# Altium PCB PiMX8MP_r0.3.PcbDoc (part 2 of 10)
Units mm, origin at the board's own origin, x right, y up, seen from the top; angles counter-clockwise.
Board outline 55 x 40 mm, 10 copper layers (Top Layer, Layer 1, Layer 2, Layer 3, Layer 4, Layer 5, Layer 6, Layer 7, Layer 8, Bottom Layer), stack 1.472 mm thick; 545 components, 477 nets, 2606 pads, 2278 vias.
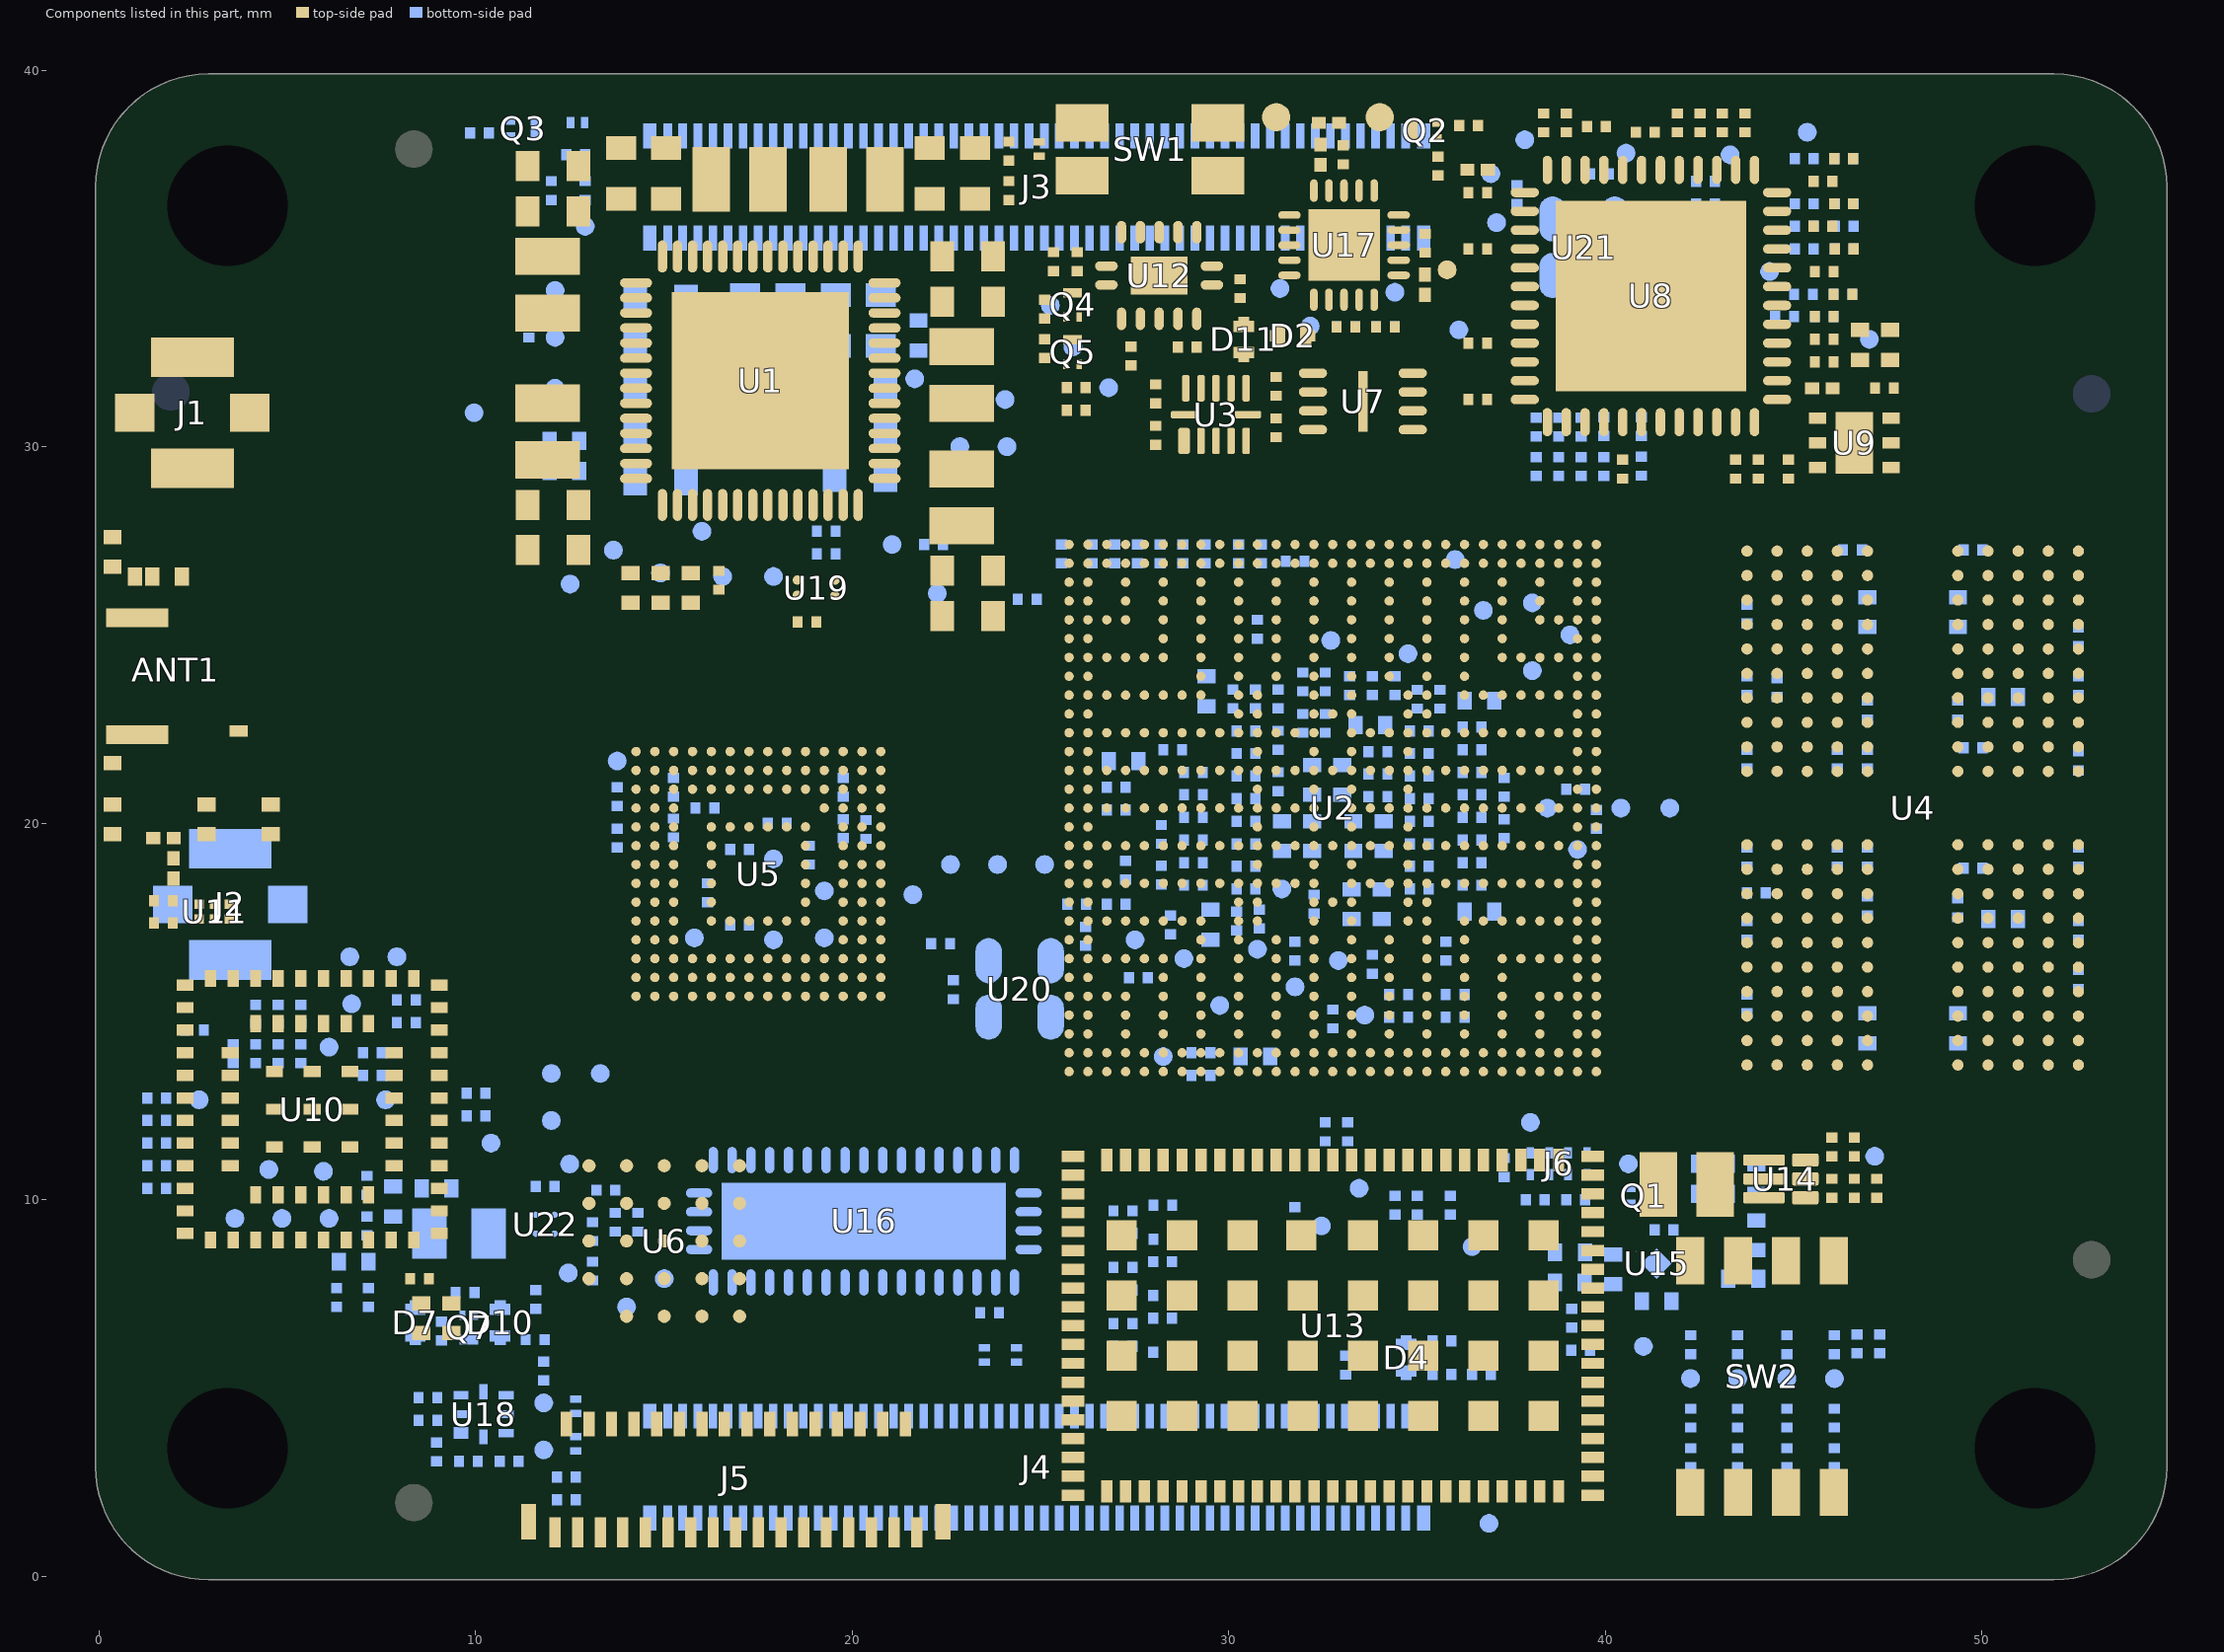
[diagram p10: the components of this part, seen from the top]

## Components (designator, comment, footprint, x,y, rotation, side; value= is the part's Value field where it differs from the comment) (continued)
R29 "100k 1%" RESC0603X03L 42.262,6.15 r270 bottom
R30 "10k 1%" RESC0603X03L 29.262,13.904 r0 bottom
R31 "0R 1%" RESC0603X03L 30.262,27.154 r90 bottom
R32 "0R 1%" RESC0603X03L 31.762,26.954 r180 bottom
R33 "0R 1%" RESC0603X03L 30.862,27.154 r270 bottom
R34 "0R 1%" RESC0603X03L 12.412,2.029 r0 bottom
R35 "0R 1%" RESC0603X03L 30.762,25.154 r270 bottom
R36 "0R 1%" RESC0603X03L 12.412,2.629 r0 bottom
R37 "4.7k 1%" RESC0603X03L 33.112,33.179 r180 bottom
R38 "4.7k 1%" RESC0603X03L 34.162,33.179 r0 bottom
R39 "8.2k 1%" RESC0603X03L 32.762,14.804 r270 bottom
R40 "10k 1%" RESC0603X03L 35.887,9.854 r90 bottom
R41 "8.2k 1%" RESC0603X03L 25.562,27.154 r270 bottom
R42 "0R 1%" RESC0603X03L 36.012,15.454 r0 bottom
R43 "0R 1%" RESC0603X03L 36.012,14.854 r0 bottom
R44 "0R 1%" RESC0603X03L 34.512,15.454 r180 bottom
R45 "0R 1%" RESC0603X03L 34.512,14.854 r180 bottom
R46 "200R 1%" RESC0603X03L 35.762,16.604 r90 bottom
R47 "200R 1%" RESC0603X03L 33.812,16.254 r90 bottom
R48 "0R 1%" RESC0603X03L 44.562,23.604 r270 bottom
R49 "10k 1%" RESC0603X03L 46.962,21.704 r90 bottom
R50 "10k 1%" RESC0603X03L 46.162,21.704 r90 bottom
R51 "0R 1%" RESC0603X03L 44.012,18.154 r0 bottom
R52 "10k 1%" RESC0603X03L 46.962,19.104 r270 bottom
R53 "10k 1%" RESC0603X03L 46.162,19.104 r270 bottom
R54 "240R 1%" RESC0603X03L 46.562,27.254 r0 bottom
R55 "240R 1%" RESC0603X03L 49.762,27.254 r180 bottom
R56 "150R 1%" RESC0603X03L 49.762,18.804 r0 bottom
R57 "150R 1%" RESC0603X03L 49.762,22.004 r0 bottom
R58 "10k 1%" RESC0603X03L 20.362,19.834 r270 bottom
R59 "10k 1%" RESC0603X03L 15.262,19.874 r90 bottom
R60 "10k 1%" RESC0603X03L 16.092,20.404 r180 bottom
R61 "10k 1%" RESC0603X03L 17.012,19.304 r0 bottom
R62 "10k 1%" RESC0603X03L 47.286,6.175 r90 bottom
R63 "10k 1%" RESC0603X03L 31.262,31.604 r270 top
R64 "10k 1%" RESC0603X03L 46.686,6.175 r90 bottom
R65 "10k 1%" RESC0603X03L 13.112,9.154 r90 bottom
R66 "4.7k 1%" RESC0603X03L 13.462,10.254 r0 bottom
R67 "10k 1%" RESC0603X03L 46.342,36.454 r0 bottom
R68 "10k 1%" RESC0603X03L 46.332,37.654 r0 bottom
R69 "10k 1%" RESC0603X03L 45.812,33.454 r0 bottom
R70 "10k 1%" RESC0603X03L 46.312,34.054 r0 bottom
R71 "10k 1%" RESC0603X03L 46.342,35.254 r0 bottom
R72 "10k 1%" RESC0603X03L 46.342,35.854 r0 bottom
R73 "1k 1%" RESC0603X03L 43.712,38.604 r90 top
R74 "10k 1%" RESC0603X03L 39.762,38.504 r180 top
R75 "10k 1%" RESC0603X03L 43.112,38.604 r90 top
R76 "22R 1%" RESC0603X03L 45.782,35.854 r180 top
R77 "22R 1%" RESC0603X03L 46.342,35.254 r180 top
R78 "22R 1%" RESC0603X03L 46.312,34.054 r180 top
R79 "22R 1%" RESC0603X03L 45.812,33.454 r180 top
R80 "0Ohm 1%" RESC1005X04L 47.562,32.704 r270 top
R81 "22R 1%" RESC0603X03L 46.332,37.654 r180 top
R82 "22R 1%" RESC0603X03L 46.332,36.454 r180 top
R83 "0Ohm 1%" RESC1005X04L 46.762,32.704 r270 top
R84 "1k 1%" RESC0603X03L 45.282,36.454 r0 bottom
R85 "1k 1%" RESC0603X03L 45.282,37.654 r0 bottom
R86 "1k 1%" RESC0603X03L 44.762,33.454 r0 bottom
R87 "1k 1%" RESC0603X03L 45.262,34.054 r0 bottom
R88 "1k 1%" RESC0603X03L 45.282,35.254 r0 bottom
R89 "1k 1%" RESC0603X03L 45.282,35.854 r0 bottom
R90 "22R 1%" RESC0603X03L 37.65,36.7 r90 bottom
R91 "6.04k 1%" RESC0603X03L 38.362,38.604 r90 top
R92 "10k 1%" RESC0603X03L 38.162,29.474 r270 bottom
R93 "10k 1%" RESC0603X03L 38.762,29.474 r270 bottom
R94 "10k 1%" RESC0603X03L 40.962,29.484 r270 bottom
R95 "10k 1%" RESC0603X03L 39.962,29.474 r270 bottom
R96 "10k 1%" RESC0603X03L 39.362,29.474 r270 bottom
R97 "10k 1%" RESC0603X03L 42.662,37.054 r0 bottom
R98 "22R 1%" RESC0603X03L 41.062,38.354 r0 top
R99 "1k 1%" RESC0603X03L 38.162,30.524 r270 bottom
R100 "1k 1%" RESC0603X03L 38.762,30.524 r270 bottom
R101 "1k 1%" RESC0603X03L 40.962,30.534 r270 bottom
R102 "1k 1%" RESC0603X03L 39.962,30.534 r270 bottom
R103 "1k 1%" RESC0603X03L 39.362,30.524 r270 bottom
R104 "1k 1%" RESC0603X03L 42.662,36.454 r180 bottom
R105 "1.8k 1%" RESC0603X03L 7.162,7.404 r90 bottom
R106 "1.8k 1%" RESC0603X03L 7.112,9.304 r270 bottom
R107 "10k 1%" RESC0603X03L 1.537,12.704 r0 bottom
R108 "10k 1%" RESC0603X03L 1.537,10.904 r0 bottom
R109 "10k 1%" RESC0603X03L 1.537,10.304 r0 bottom
R110 "10k 1%" RESC0603X03L 1.537,12.104 r0 bottom
R111 "10k 1%" RESC0603X03L 1.537,11.504 r0 bottom
R112 "0R 1%" RESC0603X03L 22.35,16.8 r180 bottom
R113 "22R 1%" RESC0603X03L 10.012,12.229 r180 bottom
R114 "22R 1%" RESC0603X03L 10.012,12.829 r180 bottom
R115 "10k 1%" RESC0603X03L 2.537,14.504 r0 bottom
R116 "22R 1%" RESC0603X03L 27.411,32.411 r270 top
R117 "4.75k 1%" RESC0603X03L 7.262,13.904 r0 bottom
R118 "10k 1%" RESC0603X03L 3.562,13.879 r90 bottom
R119 "10k 1%" RESC0603X03L 4.162,14.929 r90 bottom
R120 "10k 1%" RESC0603X03L 5.362,14.929 r90 bottom
R121 "10k 1%" RESC0603X03L 4.762,14.929 r90 bottom
R122 "0Ohm 1%" RESC1005X04L 9.362,6.854 r270 top
R123 "0R 1%" RESC0603X03L 4.162,13.879 r90 bottom
R124 "0R 1%" RESC0603X03L 5.362,13.879 r90 bottom
R125 "0R 1%" RESC0603X03L 4.762,13.879 r90 bottom
R126 "0Ohm 1%" RESC1005X04L 8.562,6.854 r270 top
R127 "0R 1%" RESC0603X03L 39.342,6.004 r180 bottom
R128 "0R 1%" RESC0603X03L 31.762,9.554 r90 bottom
R129 "0Ohm 1%" RESC1005X04L 44.012,9.059 r90 bottom
R130 "453k 1%" RESC0603X03L 46.612,11.404 r90 top
R131 "10k 1%" RESC0603X03L 46.012,10.304 r270 top
R132 "100k 1%" RESC0603X03L 47.212,10.304 r90 top
R133 "0Ohm 1%" RESC1005X04L 43.662,7.904 r180 bottom
R134 "100k 1%" RESC0603X03L 41.562,9.204 r0 bottom
R135 "10k 1%" RESC0603X03L 39.212,10.004 r180 bottom
R136 "0R 1%" RESC0603X03L 27.192,9.104 r180 bottom
R137 "0R 1%" RESC0603X03L 27.192,9.704 r180 bottom
R138 "0R 1%" RESC0603X03L 27.192,8.204 r180 bottom
R139 "0R 1%" RESC0603X03L 27.192,7.604 r180 bottom
R140 "0R 1%" RESC0603X03L 27.192,6.104 r180 bottom
R141 "0R 1%" RESC0603X03L 27.192,6.704 r180 bottom
R142 "0R 1%" RESC0603X03L 28.252,8.954 r180 bottom
R143 "0R 1%" RESC0603X03L 28.252,9.854 r180 bottom
R144 "0R 1%" RESC0603X03L 28.242,8.354 r180 bottom
R145 "0R 1%" RESC0603X03L 28.242,7.454 r180 bottom
R146 "0R 1%" RESC0603X03L 28.242,5.954 r180 bottom
R147 "0R 1%" RESC0603X03L 28.242,6.854 r180 bottom
R148 "10k 1%" RESC0603X03L 13.112,8.104 r270 bottom
R149 "0R 1%" RESC0603X03L 34.162,33.179 r180 top
R150 "0R 1%" RESC0603X03L 33.112,33.179 r0 top
R151 "10k 1%" RESC0603X03L 35.562,37.454 r90 top
R152 "100k 1%" RESC0603X03L 36.367,38.529 r180 top
R153 "4.7k 1%" RESC0603X03L 24.162,37.854 r90 top
R154 "10k 1%" RESC0603X03L 28.9,32.65 r180 top
R155 "10k 1%" RESC0603X03L 12.662,37.754 r180 bottom
R156 "100k 1%" RESC0603X03L 25.953,30.969 r180 top
R157 "10k 1%" RESC0603X03L 10.107,38.329 r0 bottom
R158 "0R 1%" RESC0603X03L 25.978,34.919 r90 top
R159 "0R 1%" RESC0603X03L 25.353,34.919 r90 top
R160 "100k 1%" RESC0603X03L 25.112,32.604 r270 top
R161 "10k 1%" RESC0603X03L 25.953,31.569 r180 top
R162 "100k 1%" RESC0603X03L 35.662,5.354 r0 bottom
R163 "10k 1%" RESC0603X03L 33.112,5.604 r90 bottom
R164 "100k 1%" RESC0603X03L 35.662,6.254 r0 bottom
R165 "10k 1%" RESC0603X03L 36.712,5.354 r180 bottom
R167 "100k 1%" RESC0603X03L 11.582,6.284 r0 bottom
R168 "10k 1%" RESC0603X03L 11.6,7.35 r270 bottom
R169 "1.8k 1%" RESC0603X03L 11.812,5.454 r90 bottom
R170 "1.8k 1%" RESC0603X03L 10.892,3.054 r180 bottom
R171 "10k 1%" RESC0603X03L 8.737,4.139 r180 bottom
R172 "10k 1%" RESC0603X03L 8.737,4.739 r180 bottom
R173 "100k 1%" RESC0603X03L 9.722,7.534 r180 bottom
R174 "24k 1%" RESC0603X03L 9.102,6.514 r90 bottom
R175 "4.7k 1%" RESC0603X03L 12.912,36.804 r270 bottom
R176 "4.7k 1%" RESC0603X03L 12.012,36.804 r270 bottom
R177 "22R 1%" RESC0603X03L 26.377,27.154 r90 bottom
R178 "22R 1%" RESC0603X03L 26.977,27.154 r90 bottom
R179 "22R 1%" RESC0603X03L 27.577,27.154 r90 bottom
R180 "22R 1%" RESC0603X03L 28.177,27.154 r90 bottom
R181 "22R 1%" RESC0603X03L 29.377,27.154 r90 bottom
R182 "22R 1%" RESC0603X03L 28.777,27.154 r90 bottom
R183 "10k 1%" RESC0603X03L 8.162,15.304 r180 bottom
R184 "12k 1%" RESC0603X03L 8.162,14.704 r0 bottom
R185 "10k 1%" RESC0603X03L 38.142,10.005 r0 bottom
R186 "0R 1%" RESC0603X03L 41.2,35.5 r270 bottom
SW1 "EVQ-P7J01P" SW_TACT_EVQ-P7J01P 27.912,37.904 r180 top
SW2 "97C04SRT" SW_DIP_4POL_97C04SRT 44.162,5.304 r0 top
TP1 "Testpoint 0.5mm" TP_0.50MM 21.662,31.804 r90 bottom
TP2 "Testpoint 0.5mm" TP_0.50MM 32.712,24.854 r90 bottom
TP3 "Testpoint 0.5mm" TP_0.50MM 12.112,31.554 r90 bottom
TP4 "Testpoint 0.5mm" TP_0.50MM 22.262,26.104 r90 bottom
TP5 "Testpoint 0.5mm" TP_0.50MM 31.412,18.254 r270 bottom
TP6 "Testpoint 0.5mm" TP_0.50MM 12.112,34.154 r90 bottom
TP7 "Testpoint 0.5mm" TP_0.50MM 12.512,26.354 r90 bottom
TP8 "Testpoint 0.5mm" TP_0.50MM 34.762,24.504 r90 bottom
TP9 "Testpoint 0.5mm" TP_0.50MM 36.762,25.654 r90 bottom
TP10 "Testpoint 0.5mm" TP_0.50MM 16.562,26.554 r90 bottom
TP11 "Testpoint 0.5mm" TP_0.50MM 21.062,27.404 r90 bottom
TP12 "Testpoint 0.5mm" TP_0.50MM 9.962,30.904 r90 bottom
TP13 "Testpoint 0.5mm" TP_0.50MM 25.262,33.754 r90 bottom
TP14 "Testpoint 0.5mm" TP_0.50MM 12.912,35.854 r90 bottom
TP15 "Testpoint 0.5mm" TP_0.50MM 28.262,13.804 r90 bottom
TP16 "Testpoint 0.5mm" TP_0.50MM 17.912,26.554 r90 bottom
TP17 "Testpoint 0.5mm" TP_0.50MM 14.912,26.649 r90 bottom
TP18 "Testpoint 0.5mm" TP_0.50MM 16.012,27.754 r90 bottom
TP19 "Testpoint 0.5mm" TP_0.50MM 13.662,27.254 r90 bottom
TP20 "Testpoint 0.5mm" TP_0.50MM 38.462,20.404 r0 bottom
TP21 "Testpoint 0.5mm" TP_0.50MM 40.412,20.404 r0 bottom
TP22 "Testpoint 0.5mm" TP_0.50MM 39.262,19.304 r0 bottom
TP23 "Testpoint 0.5mm" TP_0.50MM 41.712,20.404 r0 bottom
TP24 "Testpoint 0.5mm" TP_0.50MM 28.812,16.404 r90 bottom
TP25 "Testpoint 0.5mm" TP_0.50MM 30.762,16.654 r90 bottom
TP26 "Testpoint 0.5mm" TP_0.50MM 46.086,5.25 r90 bottom
TP27 "Testpoint 0.5mm" TP_0.50MM 44.818,5.25 r90 bottom
TP28 "Testpoint 0.5mm" TP_0.50MM 43.517,5.25 r90 bottom
TP29 "Testpoint 0.5mm" TP_0.50MM 42.262,5.254 r90 bottom
TP30 "Testpoint 0.5mm" TP_0.50MM 32.912,16.354 r90 bottom
TP31 "Testpoint 0.5mm" TP_0.50MM 31.762,15.654 r90 bottom
TP32 "Testpoint 0.5mm" TP_0.50MM 33.612,14.904 r90 bottom
TP33 "Testpoint 0.5mm" TP_0.50MM 29.762,15.162 r90 bottom
TP34 "Testpoint 0.5mm" TP_0.50MM 25.112,18.904 r90 bottom
TP35 "Testpoint 0.5mm" TP_0.50MM 21.612,18.104 r90 bottom
TP36 "Testpoint 0.5mm" TP_0.50MM 23.862,18.904 r90 bottom
TP37 "Testpoint 0.5mm" TP_0.50MM 22.612,18.904 r90 bottom
TP39 "Testpoint 0.5mm" TP_0.50MM 27.512,16.904 r90 bottom
TP43 "Testpoint 0.5mm" TP_0.50MM 17.912,19.054 r90 bottom
TP44 "Testpoint 0.5mm" TP_0.50mm 13.762,21.654 r90 bottom
TP45 "Testpoint 0.5mm" TP_0.50MM 19.262,18.204 r90 bottom
TP46 "Testpoint 0.5mm" TP_0.50MM 19.262,16.954 r90 bottom
TP47 "Testpoint 0.5mm" TP_0.50MM 17.912,16.904 r90 bottom
TP48 "Testpoint 0.5mm" TP_0.50MM 15.812,16.954 r90 bottom
TP49 "Testpoint 0.5mm" TP_0.50MM 31.362,34.204 r90 bottom
TP50 "Testpoint 0.5mm" TP_0.50MM 39.062,25.004 r90 bottom
TP51 "Testpoint 0.5mm" TP_0.50MM 36.012,27.004 r90 bottom
TP52 "Testpoint 0.5mm" TP_0.50MM 38.062,24.054 r90 bottom
TP53 "Testpoint 0.5mm" TP_0.50MM 38.062,25.854 r180 bottom
TP54 "Testpoint 0.5mm" TP_0.50MM 13.312,13.354 r180 bottom
TP55 "Testpoint 0.5mm" TP_0.50MM 12.5,10.95 r270 bottom
TP56 "Testpoint 0.5mm" TP_0.50MM 12.012,12.104 r270 bottom
TP57 "Testpoint 0.5mm" TP_0.50MM 12.012,13.354 r180 bottom
TP58 "Testpoint 0.5mm" TP_0.50MM 15.012,7.904 r270 bottom
TP59 "Testpoint 0.5mm" TP_0.50MM 14.012,7.154 r270 bottom
TP60 "Testpoint 0.5mm" TP_0.50MM 47.012,32.854 r180 bottom
TP61 "Testpoint 0.5mm" TP_0.50MM 45.362,38.354 r180 bottom
TP62 "Testpoint 0.5mm" TP_0.50MM 36.962,37.254 r90 bottom
TP63 "Testpoint 0.5mm" TP_0.50MM 42.762,34.554 r90 bottom
TP64 "Testpoint 0.5mm" TP_0.50MM 40.55,37.8 r90 bottom
TP65 "Testpoint 0.5mm" TP_0.50MM 37.862,38.154 r90 bottom
TP66 "Testpoint 0.5mm" TP_0.50MM 44.362,34.654 r90 bottom
TP67 "Testpoint 0.5mm" TP_0.50MM 43.312,37.754 r90 bottom
TP68 "Testpoint 0.5mm" TP_0.50MM 37.112,35.954 r90 bottom
TP70 "Testpoint 0.5mm" TP_0.50MM 34.412,34.104 r90 bottom
TP71 "Testpoint 0.5mm" TP_0.50MM 32.162,33.204 r90 bottom
TP72 "Testpoint 0.5mm" TP_0.50MM 6.712,15.204 r270 bottom
TP73 "Testpoint 0.5mm" TP_0.50MM 7.912,16.454 r270 bottom
TP74 "Testpoint 0.5mm" TP_0.50MM 6.662,16.454 r270 bottom
TP75 "Testpoint 0.5mm" TP_0.50MM 6.112,14.054 r180 bottom
TP76 "Testpoint 0.5mm" TP_0.50MM 3.612,9.504 r270 bottom
TP77 "Testpoint 0.5mm" TP_0.50MM 4.862,9.504 r270 bottom
TP78 "Testpoint 0.5mm" TP_0.50MM 4.512,10.804 r270 bottom
TP79 "Testpoint 0.5mm" TP_0.50MM 7.612,12.654 r180 bottom
TP80 "Testpoint 0.5mm" TP_0.50MM 6.112,9.504 r270 bottom
TP81 "Testpoint 0.5mm" TP_0.50MM 5.962,10.754 r270 bottom
TP82 "Testpoint 0.5mm" TP_0.50MM 10.412,11.504 r180 bottom
TP83 "Testpoint 0.5mm" TP_0.50MM 2.662,12.654 r180 bottom
TP84 "Testpoint 0.5mm" TP_0.50MM 41.012,6.104 r270 bottom
TP85 "Testpoint 0.5mm" TP_0.50MM 36.912,1.404 r270 bottom
TP86 "Testpoint 0.5mm" TP_0.50MM 33.462,10.304 r180 bottom
TP87 "Testpoint 0.5mm" TP_0.50MM 32.462,9.304 r270 bottom
TP88 "Testpoint 0.5mm" TP_0.50MM 36.462,8.754 r90 bottom
TP89 "Testpoint 0.5mm" TP_0.50MM 38.012,12.054 r90 bottom
TP90 "Testpoint 0.5mm" TP_0.50MM 47.154,11.154 r270 bottom
TP91 "Testpoint 0.5mm" TP_0.50MM 40.612,10.954 r180 bottom
TP92 "Testpoint 0.75mm" TP_0.75mm 31.262,38.754 r90 top
TP93 "Testpoint 0.75mm" TP_0.75mm 34.012,38.754 r90 top
TP94 "Testpoint 0.5mm" TP_0.50MM 12.462,8.054 r0 bottom
TP95 "Testpoint 0.5mm" TP_0.50MM 36.112,33.104 r90 bottom
TP96 "Testpoint 0.5mm" TP_0.50mm 35.8,34.7 r90 top
TP97 "Testpoint 0.5mm" TP_0.50MM 24.062,31.254 r270 bottom
TP98 "Testpoint 0.5mm" TP_0.50MM 24.112,30.004 r270 bottom
TP99 "Testpoint 0.5mm" TP_0.50MM 22.812,31.254 r270 bottom
TP100 "Testpoint 0.5mm" TP_0.50MM 22.862,30.004 r270 bottom
TP101 "Testpoint 0.5mm" TP_0.50MM 12.112,32.904 r90 bottom
TP102 "Testpoint 0.5mm" TP_0.50MM 26.812,31.569 r90 bottom
TP103 "Testpoint 0.5mm" TP_0.50MM 25.862,32.654 r90 bottom
TP104 "Testpoint 0.5mm" TP_0.50MM 11.812,4.604 r90 bottom
TP105 "Testpoint 0.5mm" TP_0.50MM 11.812,3.354 r270 bottom
U1 "PCA9450CHN" QFN40P700X700X100_HS-57L 17.562,31.754 r90 top
U2 "MIMX8ML8CVNKZAB" BGA548C50P29X29_1500X1500X148 32.762,20.404 r180 top locked
U3 "LSF0204GU12X" QFN40P170X200X50-12L 29.662,30.854 r90 top
U4 "MT53E1536M32D4DE-046-AIT-C" BGA200C65P12X22_1000X1450X114 48.162,20.404 r0 top locked
U5 "SDINBDG4-16G-I1" BGA153C50P14X14_1150X1300X80 17.512,18.654 r270 top locked
U6 "IS25WP064A-RHLE" BGA24C100P5X5_600X800X120 15.012,8.904 r90 top locked
U7 "W25Q16JVUXIQ TR" QFN50P300X200X60_HS-9L 33.562,31.204 r180 top
U8 "LAN8840-V/PSA" QFN50P700X700X100_HS-49L 41.212,34.004 r0 top locked
U9 "TLV73311PQDRVRQ1" SON65P200X80_HS-7L 46.612,30.104 r0 top
U10 "LBEE5PK2BC" "WIFI-BLE Module_LBEE5PK2BC" 5.662,12.404 r90 top locked
U11 "BGS12P2L6" PSON40P70X32-6N 3.062,17.654 r90 top
U12 "SN74LV6T17" QFN50P250X300X80_HS-13L 28.153,34.549 r270 top
U13 "Edge_TPU_G313-06329-00" LGA120C50P19X22_1000X1500X150 32.762,6.654 r180 top locked
U14 "TLV62595DMQR" VSON50P150X150X100_HS-6L 44.662,10.554 r180 top
U15 "TLV74018PDQNR" X2SON-DFN 41.362,8.304 r0 bottom
U16 "TS3DV642A0RUAR" QFN50P350X900X80_HS-43L 20.312,9.429 r90 bottom
U17 "SE051" QFN40P300X300X33_HS-21L 33.062,35.354 r0 top
U18 "PCA9509GM,125" XQFN8_160X106X50 10.212,4.304 r0 bottom
U19 "SiT1532AI-J4-D14-32.768E" OSCILLATOR_SITIME_SiT1532AI-J4-D14-32.768E 19.046,26.254 r270 top
U20 "DSC1001DI5-024.0000" DFN165P250X90-4N 24.45,15.6 r270 bottom
U21 "DSC1001DI5-025.0000" DFN165P250X90-4N 39.425,35.3 r90 bottom
U22 "SN74LVC1G17YZVR" BGA4C50P2X2_89X89X50 11.85,9.35 r180 bottom

## Footprints (in the part's own frame and the unit in brackets; to place one, negate y for a bottom-side part, rotate by r counter-clockwise, add the part's x,y. Pads: shape width x height; smd on the part's side, far side on the other; paste and mask are expansions set on the pad)
ANTENNA_ACAR0301-SW2 [mm]
  rect 0.5x1.65 smd mask+0.05: 1(-1.55,0) 2(1.55,0)
  rect 0.3x0.48 smd paste-1 mask+0.102: 3(-1.45,-2.7)
  rect 0.48x0.38 smd paste-1 mask+0.102: 4(2.65,0.05)
  rect 0.38x0.48 smd paste-1 mask+0.102: 5(-2.3,0.65)
  Top Layer region: 3.1,0.9 2.4,0.9 2.4,-0.6 2.9,-0.6 2.9,0.4 3.1,0.4
  Top Layer region: 1.8,0.9 1.3,0.9 1.3,-1.5 2.9,-1.5 2.9,-1 2.4,-1 2.4,-1.2 1.8,-1.2
  Top Layer region: -1.3,0.9 -1.3,-1.2 -4,-1.2 -4,-0.7 -1.8,-0.7 -1.8,0.9
  Top Layer region: -2.1,0.9 -2.1,0.4 -3.6,0.4 -3.6,0.9
  Top Layer region: -3.405,-3.4 -3.405,-3.7 -1.3,-3.7 -1.3,-1.7 -3.405,-1.7 -3.405,-2 -1.6,-2 -1.6,-3.4
  silkscreen extent -0.6,-0.72 0.6,0.72, body extent -1.53,-0.8 1.53,0.8, height 0.55
BGA4C50P2X2_89X89X50 [mm] "BGA, 4-Leads, Body 0,89x0,89mmx0,50mm, Pitch 0,50mm"
  round 0.17 smd: A1(-0.25,0.25) A2(0.25,0.25) B1(-0.25,-0.25) B2(0.25,-0.25)
  silkscreen extent -0.6,0.5 -0.5,0.6, body extent -0.45,-0.45 0.45,0.45, height 0.5
BGA24C100P5X5_600X800X120 [mm] "BGA, 24-Leads, Body 6,00x8,00mmx1,20mm, Pitch 1,00mm"
  round 0.35 smd: A2(-1,2) A3(0,2) A4(1,2) A5(2,2) B1(-2,1) B2(-1,1) B3(0,1) B4(1,1) B5(2,1) C1(-2,0) C2(-1,0) C3(0,0) C4(1,0) C5(2,0) D1(-2,-1) D2(-1,-1) D3(0,-1) D4(1,-1) D5(2,-1) E1(-2,-2) E2(-1,-2) E3(0,-2) E4(1,-2) E5(2,-2)
  Top Layer region: 3.5,-4 3,-4 3,-4.5 3.5,-4.5
  Top Layer region: -3.5,4 -3,4 -3,4.5 -3.5,4.5
  silkscreen extent -3.87,3.37 -3.63,3.62, body extent -3,-4 3,4, height 1.2
BGA153C50P14X14_1150X1300X80 [mm] "BGA, 153-Leads, Body 11,50x13,00mmx0,80mm, Pitch 0,50mm"
  round 0.25 smd: A1(-3.25,3.25) A2(-2.75,3.25) A3(-2.25,3.25) A4(-1.75,3.25) A5(-1.25,3.25) A6(-0.75,3.25) A7(-0.25,3.25) A8(0.25,3.25) A9(0.75,3.25) A10(1.25,3.25) A11(1.75,3.25) A12(2.25,3.25) A13(2.75,3.25) A14(3.25,3.25) B1(-3.25,2.75) B2(-2.75,2.75) B3(-2.25,2.75) B4(-1.75,2.75) B5(-1.25,2.75) B6(-0.75,2.75) B7(-0.25,2.75) B8(0.25,2.75) B9(0.75,2.75) B10(1.25,2.75) B11(1.75,2.75) B12(2.25,2.75) B13(2.75,2.75) B14(3.25,2.75) C1(-3.25,2.25) C2(-2.75,2.25) C3(-2.25,2.25) C4(-1.75,2.25) C5(-1.25,2.25) C6(-0.75,2.25) C7(-0.25,2.25) C8(0.25,2.25) C9(0.75,2.25) C10(1.25,2.25) C11(1.75,2.25) C12(2.25,2.25) C13(2.75,2.25) C14(3.25,2.25) D1(-3.25,1.75) D2(-2.75,1.75) D3(-2.25,1.75) D4(-1.75,1.75) D12(2.25,1.75) D13(2.75,1.75) D14(3.25,1.75) E1(-3.25,1.25) E2(-2.75,1.25) E3(-2.25,1.25) E5(-1.25,1.25) E6(-0.75,1.25) E7(-0.25,1.25) E8(0.25,1.25) E9(0.75,1.25) E10(1.25,1.25) E12(2.25,1.25) E13(2.75,1.25) E14(3.25,1.25) F1(-3.25,0.75) F2(-2.75,0.75) F3(-2.25,0.75) F5(-1.25,0.75) F10(1.25,0.75) F12(2.25,0.75) F13(2.75,0.75) F14(3.25,0.75) G1(-3.25,0.25) G2(-2.75,0.25) G3(-2.25,0.25) G5(-1.25,0.25) G10(1.25,0.25) G12(2.25,0.25) G13(2.75,0.25) G14(3.25,0.25) H1(-3.25,-0.25) H2(-2.75,-0.25) H3(-2.25,-0.25) H5(-1.25,-0.25) H10(1.25,-0.25) H12(2.25,-0.25) H13(2.75,-0.25) H14(3.25,-0.25) J1(-3.25,-0.75) J2(-2.75,-0.75) J3(-2.25,-0.75) J5(-1.25,-0.75) J10(1.25,-0.75) J12(2.25,-0.75) J13(2.75,-0.75) J14(3.25,-0.75) K1(-3.25,-1.25) K2(-2.75,-1.25) K3(-2.25,-1.25) K5(-1.25,-1.25) K6(-0.75,-1.25) K7(-0.25,-1.25) K8(0.25,-1.25) K9(0.75,-1.25) K10(1.25,-1.25) K12(2.25,-1.25) K13(2.75,-1.25) K14(3.25,-1.25) L1(-3.25,-1.75) L2(-2.75,-1.75) L3(-2.25,-1.75) L12(2.25,-1.75) L13(2.75,-1.75) L14(3.25,-1.75) M1(-3.25,-2.25) M2(-2.75,-2.25) M3(-2.25,-2.25) M4(-1.75,-2.25) M5(-1.25,-2.25) M6(-0.75,-2.25) M7(-0.25,-2.25) M8(0.25,-2.25) M9(0.75,-2.25) M10(1.25,-2.25) M11(1.75,-2.25) M12(2.25,-2.25) M13(2.75,-2.25) M14(3.25,-2.25) N1(-3.25,-2.75) N2(-2.75,-2.75) N3(-2.25,-2.75) N4(-1.75,-2.75) N5(-1.25,-2.75) N6(-0.75,-2.75) N7(-0.25,-2.75) N8(0.25,-2.75) N9(0.75,-2.75) N10(1.25,-2.75) N11(1.75,-2.75) N12(2.25,-2.75) N13(2.75,-2.75) N14(3.25,-2.75) P1(-3.25,-3.25) P2(-2.75,-3.25) P3(-2.25,-3.25) P4(-1.75,-3.25) P5(-1.25,-3.25) P6(-0.75,-3.25) P7(-0.25,-3.25) P8(0.25,-3.25) P9(0.75,-3.25) P10(1.25,-3.25) P11(1.75,-3.25) P12(2.25,-3.25) P13(2.75,-3.25) P14(3.25,-3.25)
  Top Layer region: 5.75,7 5.75,6.5 6.25,6.5 6.25,7
  Top Layer region: -5.75,-7 -5.75,-6.5 -6.25,-6.5 -6.25,-7
  silkscreen extent -6.62,5.88 -6.38,6.13, body extent -5.75,-6.5 5.75,6.5, height 0.8
BGA200C65P12X22_1000X1450X114 [mm] "BGA, 200-Leads, Body 10,00x14,50mmx1,14mm, Pitch 0,65mm"
  round 0.3 smd: A1(-4.4,6.825) A2(-3.6,6.825) A3(-2.8,6.825) A4(-2,6.825) A5(-1.2,6.825) A8(1.2,6.825) A9(2,6.825) A10(2.8,6.825) A11(3.6,6.825) A12(4.4,6.825) AA1(-4.4,-6.175) AA2(-3.6,-6.175) AA3(-2.8,-6.175) AA4(-2,-6.175) AA5(-1.2,-6.175) AA8(1.2,-6.175) AA9(2,-6.175) AA10(2.8,-6.175) AA11(3.6,-6.175) AA12(4.4,-6.175) AB1(-4.4,-6.825) AB2(-3.6,-6.825) AB3(-2.8,-6.825) AB4(-2,-6.825) AB5(-1.2,-6.825) AB8(1.2,-6.825) AB9(2,-6.825) AB10(2.8,-6.825) AB11(3.6,-6.825) AB12(4.4,-6.825) B1(-4.4,6.175) B2(-3.6,6.175) B3(-2.8,6.175) B4(-2,6.175) B5(-1.2,6.175) B8(1.2,6.175) B9(2,6.175) B10(2.8,6.175) B11(3.6,6.175) B12(4.4,6.175) C1(-4.4,5.525) C2(-3.6,5.525) C3(-2.8,5.525) C4(-2,5.525) C5(-1.2,5.525) C8(1.2,5.525) C9(2,5.525) C10(2.8,5.525) C11(3.6,5.525) C12(4.4,5.525) D1(-4.4,4.875) D2(-3.6,4.875) D3(-2.8,4.875) D4(-2,4.875) D5(-1.2,4.875) D8(1.2,4.875) D9(2,4.875) D10(2.8,4.875) D11(3.6,4.875) D12(4.4,4.875) E1(-4.4,4.225) E2(-3.6,4.225) E3(-2.8,4.225) E4(-2,4.225) E5(-1.2,4.225) E8(1.2,4.225) E9(2,4.225) E10(2.8,4.225) E11(3.6,4.225) E12(4.4,4.225) F1(-4.4,3.575) F2(-3.6,3.575) F3(-2.8,3.575) F4(-2,3.575) F5(-1.2,3.575) F8(1.2,3.575) F9(2,3.575) F10(2.8,3.575) F11(3.6,3.575) F12(4.4,3.575) G1(-4.4,2.925) G2(-3.6,2.925) G3(-2.8,2.925) G4(-2,2.925) G5(-1.2,2.925) G8(1.2,2.925) G9(2,2.925) G10(2.8,2.925) G11(3.6,2.925) G12(4.4,2.925) H1(-4.4,2.275) H2(-3.6,2.275) H3(-2.8,2.275) H4(-2,2.275) H5(-1.2,2.275) H8(1.2,2.275) H9(2,2.275) H10(2.8,2.275) H11(3.6,2.275) H12(4.4,2.275) J1(-4.4,1.625) J2(-3.6,1.625) J3(-2.8,1.625) J4(-2,1.625) J5(-1.2,1.625) J8(1.2,1.625) J9(2,1.625) J10(2.8,1.625) J11(3.6,1.625) J12(4.4,1.625) K1(-4.4,0.975) K2(-3.6,0.975) K3(-2.8,0.975) K4(-2,0.975) K5(-1.2,0.975) K8(1.2,0.975) K9(2,0.975) K10(2.8,0.975) K11(3.6,0.975) K12(4.4,0.975) N1(-4.4,-0.975) N2(-3.6,-0.975) N3(-2.8,-0.975) N4(-2,-0.975) N5(-1.2,-0.975) N8(1.2,-0.975) N9(2,-0.975) N10(2.8,-0.975) N11(3.6,-0.975) N12(4.4,-0.975) P1(-4.4,-1.625) P2(-3.6,-1.625) P3(-2.8,-1.625) P4(-2,-1.625) P5(-1.2,-1.625) P8(1.2,-1.625) P9(2,-1.625) P10(2.8,-1.625) P11(3.6,-1.625) P12(4.4,-1.625) R1(-4.4,-2.275) R2(-3.6,-2.275) R3(-2.8,-2.275) R4(-2,-2.275) R5(-1.2,-2.275) R8(1.2,-2.275) R9(2,-2.275) R10(2.8,-2.275) R11(3.6,-2.275) R12(4.4,-2.275) T1(-4.4,-2.925) T2(-3.6,-2.925) T3(-2.8,-2.925) T4(-2,-2.925) T5(-1.2,-2.925) T8(1.2,-2.925) T9(2,-2.925) T10(2.8,-2.925) T11(3.6,-2.925) T12(4.4,-2.925) U1(-4.4,-3.575) U2(-3.6,-3.575) U3(-2.8,-3.575) U4(-2,-3.575) U5(-1.2,-3.575) U8(1.2,-3.575) U9(2,-3.575) U10(2.8,-3.575) U11(3.6,-3.575) U12(4.4,-3.575) V1(-4.4,-4.225) V2(-3.6,-4.225) V3(-2.8,-4.225) V4(-2,-4.225) V5(-1.2,-4.225) V8(1.2,-4.225) V9(2,-4.225) V10(2.8,-4.225) V11(3.6,-4.225) V12(4.4,-4.225) W1(-4.4,-4.875) W2(-3.6,-4.875) W3(-2.8,-4.875) W4(-2,-4.875) W5(-1.2,-4.875) W8(1.2,-4.875) W9(2,-4.875) W10(2.8,-4.875) W11(3.6,-4.875) W12(4.4,-4.875) Y1(-4.4,-5.525) Y2(-3.6,-5.525) Y3(-2.8,-5.525) Y4(-2,-5.525) Y5(-1.2,-5.525) Y8(1.2,-5.525) Y9(2,-5.525) Y10(2.8,-5.525) Y11(3.6,-5.525) Y12(4.4,-5.525)
  Top Layer region: -5.5,7.25 -5,7.25 -5,7.75 -5.5,7.75
  Top Layer region: 5.5,-7.25 5,-7.25 5,-7.75 5.5,-7.75
  silkscreen extent -5.62,6.63 -5.37,6.87, body extent -5,-7.25 5,7.25, height 0.95
BGA548C50P29X29_1500X1500X148 [mm] "BGA, 548-Leads, Body 15,00x15,00mmx1,48mm, Pitch 0,50mm"
  round 0.25 smd: A1(-7,7) A2(-6.5,7) A3(-6,7) A4(-5.5,7) A5(-5,7) A6(-4.5,7) A7(-4,7) A8(-3.5,7) A9(-3,7) A10(-2.5,7) A11(-2,7) A12(-1.5,7) A13(-1,7) A14(-0.5,7) A15(0,7) A16(0.5,7) A17(1,7) A18(1.5,7) A19(2,7) A20(2.5,7) A21(3,7) A22(3.5,7) A23(4,7) A24(4.5,7) A25(5,7) A26(5.5,7) A27(6,7) A28(6.5,7) A29(7,7) AA1(-7,-3) AA2(-6.5,-3) AA3(-6,-3) AA4(-5.5,-3) AA5(-5,-3) AA6(-4.5,-3) AA7(-4,-3) AA8(-3.5,-3) AA10(-2.5,-3) AA11(-2,-3) AA14(-0.5,-3) AA16(0.5,-3) AA19(2,-3) AA20(2.5,-3) AA22(3.5,-3) AA23(4,-3) AA24(4.5,-3) AA25(5,-3) AA26(5.5,-3) AA27(6,-3) AA28(6.5,-3) AA29(7,-3) AB1(-7,-3.5) AB2(-6.5,-3.5) AB8(-3.5,-3.5) AB10(-2.5,-3.5) AB12(-1.5,-3.5) AB14(-0.5,-3.5) AB16(0.5,-3.5) AB18(1.5,-3.5) AB20(2.5,-3.5) AB22(3.5,-3.5) AB28(6.5,-3.5) AB29(7,-3.5) AC1(-7,-4) AC2(-6.5,-4) AC3(-6,-4) AC4(-5.5,-4) AC5(-5,-4) AC6(-4.5,-4) AC8(-3.5,-4) AC10(-2.5,-4) AC12(-1.5,-4) AC14(-0.5,-4) AC16(0.5,-4) AC18(1.5,-4) AC20(2.5,-4) AC22(3.5,-4) AC24(4.5,-4) AC25(5,-4) AC26(5.5,-4) AC27(6,-4) AC28(6.5,-4) AC29(7,-4) AD1(-7,-4.5) AD2(-6.5,-4.5) AD6(-4.5,-4.5) AD8(-3.5,-4.5) AD10(-2.5,-4.5) AD12(-1.5,-4.5) AD14(-0.5,-4.5) AD16(0.5,-4.5) AD18(1.5,-4.5) AD20(2.5,-4.5) AD22(3.5,-4.5) AD24(4.5,-4.5) AD28(6.5,-4.5) AD29(7,-4.5) AE1(-7,-5) AE2(-6.5,-5) AE3(-6,-5) AE4(-5.5,-5) AE6(-4.5,-5) AE8(-3.5,-5) AE10(-2.5,-5) AE12(-1.5,-5) AE14(-0.5,-5) AE16(0.5,-5) AE18(1.5,-5) AE20(2.5,-5) AE22(3.5,-5) AE24(4.5,-5) AE26(5.5,-5) AE27(6,-5) AE28(6.5,-5) AE29(7,-5) AF1(-7,-5.5) AF2(-6.5,-5.5) AF4(-5.5,-5.5) AF6(-4.5,-5.5) AF8(-3.5,-5.5) AF10(-2.5,-5.5) AF12(-1.5,-5.5) AF14(-0.5,-5.5) AF16(0.5,-5.5) AF18(1.5,-5.5) AF20(2.5,-5.5) AF22(3.5,-5.5) AF24(4.5,-5.5) AF26(5.5,-5.5) AF28(6.5,-5.5) AF29(7,-5.5) AG1(-7,-6) AG2(-6.5,-6) AG4(-5.5,-6) AG6(-4.5,-6) AG8(-3.5,-6) AG10(-2.5,-6) AG12(-1.5,-6) AG14(-0.5,-6) AG16(0.5,-6) AG18(1.5,-6) AG20(2.5,-6) AG22(3.5,-6) AG24(4.5,-6) AG26(5.5,-6) AG28(6.5,-6) AG29(7,-6) AH1(-7,-6.5) AH2(-6.5,-6.5) AH3(-6,-6.5) AH4(-5.5,-6.5) AH5(-5,-6.5) AH6(-4.5,-6.5) AH7(-4,-6.5) AH8(-3.5,-6.5) AH9(-3,-6.5) AH10(-2.5,-6.5) AH11(-2,-6.5) AH12(-1.5,-6.5) AH13(-1,-6.5) AH14(-0.5,-6.5) AH15(0,-6.5) AH16(0.5,-6.5) AH17(1,-6.5) AH18(1.5,-6.5) AH19(2,-6.5) AH20(2.5,-6.5) AH21(3,-6.5) AH22(3.5,-6.5) AH23(4,-6.5) AH24(4.5,-6.5) AH25(5,-6.5) AH26(5.5,-6.5) AH27(6,-6.5) AH28(6.5,-6.5) AH29(7,-6.5) AJ1(-7,-7) AJ2(-6.5,-7) AJ3(-6,-7) AJ4(-5.5,-7) AJ5(-5,-7) AJ6(-4.5,-7) AJ7(-4,-7) AJ8(-3.5,-7) AJ9(-3,-7) AJ10(-2.5,-7) AJ11(-2,-7) AJ12(-1.5,-7) AJ13(-1,-7) AJ14(-0.5,-7) AJ15(0,-7) AJ16(0.5,-7) AJ17(1,-7) AJ18(1.5,-7) AJ19(2,-7) AJ20(2.5,-7) AJ21(3,-7) AJ22(3.5,-7) AJ23(4,-7) AJ24(4.5,-7) AJ25(5,-7) AJ26(5.5,-7) AJ27(6,-7) AJ28(6.5,-7) AJ29(7,-7) B1(-7,6.5) B2(-6.5,6.5) B3(-6,6.5) B4(-5.5,6.5) B5(-5,6.5) B6(-4.5,6.5) B7(-4,6.5) B8(-3.5,6.5) B9(-3,6.5) B10(-2.5,6.5) B11(-2,6.5) B12(-1.5,6.5) B13(-1,6.5) B14(-0.5,6.5) B15(0,6.5) B16(0.5,6.5) B17(1,6.5) B18(1.5,6.5) B19(2,6.5) B20(2.5,6.5) B21(3,6.5) B22(3.5,6.5) B23(4,6.5) B24(4.5,6.5) B25(5,6.5) B26(5.5,6.5) B27(6,6.5) B28(6.5,6.5) B29(7,6.5) C1(-7,6) C2(-6.5,6) C4(-5.5,6) C6(-4.5,6) C8(-3.5,6) C10(-2.5,6) C12(-1.5,6) C14(-0.5,6) C16(0.5,6) C18(1.5,6) C20(2.5,6) C22(3.5,6) C24(4.5,6) C26(5.5,6) C28(6.5,6) C29(7,6) D1(-7,5.5) D2(-6.5,5.5) D4(-5.5,5.5) D6(-4.5,5.5) D8(-3.5,5.5) D10(-2.5,5.5) D12(-1.5,5.5) D14(-0.5,5.5) D16(0.5,5.5) D18(1.5,5.5) D20(2.5,5.5) D22(3.5,5.5) D24(4.5,5.5) D26(5.5,5.5) D28(6.5,5.5) D29(7,5.5) E1(-7,5) E2(-6.5,5) E3(-6,5) E4(-5.5,5) E6(-4.5,5) E8(-3.5,5) E10(-2.5,5) E12(-1.5,5) E14(-0.5,5) E16(0.5,5) E18(1.5,5) E20(2.5,5) E22(3.5,5) E24(4.5,5) E26(5.5,5) E27(6,5) E28(6.5,5) E29(7,5) F1(-7,4.5) F2(-6.5,4.5) F6(-4.5,4.5) F8(-3.5,4.5) F10(-2.5,4.5) F12(-1.5,4.5) F14(-0.5,4.5) F16(0.5,4.5) F18(1.5,4.5) F20(2.5,4.5) F22(3.5,4.5) F24(4.5,4.5) F28(6.5,4.5) F29(7,4.5) G1(-7,4) G2(-6.5,4) G3(-6,4) G4(-5.5,4) G5(-5,4) G6(-4.5,4) G8(-3.5,4) G10(-2.5,4) G12(-1.5,4) G14(-0.5,4) G16(0.5,4) G18(1.5,4) G20(2.5,4) G22(3.5,4) G24(4.5,4) G25(5,4) G26(5.5,4) G27(6,4) G28(6.5,4) G29(7,4) H1(-7,3.5) H2(-6.5,3.5) H8(-3.5,3.5) H10(-2.5,3.5) H12(-1.5,3.5) H14(-0.5,3.5) H16(0.5,3.5) H18(1.5,3.5) H20(2.5,3.5) H22(3.5,3.5) H28(6.5,3.5) H29(7,3.5) J1(-7,3) J2(-6.5,3) J3(-6,3) J4(-5.5,3) J5(-5,3) J6(-4.5,3) J7(-4,3) J8(-3.5,3) J10(-2.5,3) J11(-2,3) J14(-0.5,3) J16(0.5,3) J19(2,3) J20(2.5,3) J22(3.5,3) J23(4,3) J24(4.5,3) J25(5,3) J26(5.5,3) J27(6,3) J28(6.5,3) J29(7,3) K1(-7,2.5) K2(-6.5,2.5) K10(-2.5,2.5) K11(-2,2.5) K14(-0.5,2.5) K15(0,2.5) K16(0.5,2.5) K19(2,2.5) K20(2.5,2.5) K28(6.5,2.5) K29(7,2.5) L1(-7,2) L2(-6.5,2) L3(-6,2) L4(-5.5,2) L5(-5,2) L6(-4.5,2) L7(-4,2) L8(-3.5,2) L9(-3,2) L10(-2.5,2) L11(-2,2) L12(-1.5,2) L13(-1,2) L14(-0.5,2) L16(0.5,2) L17(1,2) L18(1.5,2) L19(2,2) L20(2.5,2) L21(3,2) L22(3.5,2) L23(4,2) L24(4.5,2) L25(5,2) L26(5.5,2) L27(6,2) L28(6.5,2) L29(7,2) M1(-7,1.5) M2(-6.5,1.5) M11(-2,1.5) M14(-0.5,1.5) M16(0.5,1.5) M19(2,1.5) M28(6.5,1.5) M29(7,1.5) N1(-7,1) N2(-6.5,1) N3(-6,1) N4(-5.5,1) N5(-5,1) N6(-4.5,1) N7(-4,1) N8(-3.5,1) N9(-3,1) N10(-2.5,1) N11(-2,1) N12(-1.5,1) N13(-1,1) N14(-0.5,1) N15(0,1) N16(0.5,1) N17(1,1) N18(1.5,1) N19(2,1) N20(2.5,1) N21(3,1) N22(3.5,1) N23(4,1) N24(4.5,1) N25(5,1) N26(5.5,1) N27(6,1) N28(6.5,1) N29(7,1) P1(-7,0.5) P2(-6.5,0.5) P11(-2,0.5) P14(-0.5,0.5) P16(0.5,0.5) P19(2,0.5) P28(6.5,0.5) P29(7,0.5) R1(-7,0) R2(-6.5,0) R3(-6,0) R4(-5.5,0) R5(-5,0) R6(-4.5,0) R7(-4,0) R8(-3.5,0) R9(-3,0) R10(-2.5,0) R11(-2,0) R12(-1.5,0) R13(-1,0) R14(-0.5,0) R16(0.5,0) R17(1,0) R18(1.5,0) R19(2,0) R20(2.5,0) R21(3,0) R22(3.5,0) R23(4,0) R24(4.5,0) R25(5,0) R26(5.5,0) R27(6,0) R28(6.5,0) R29(7,0) T1(-7,-0.5) T2(-6.5,-0.5) T11(-2,-0.5) T14(-0.5,-0.5) T16(0.5,-0.5) T19(2,-0.5) T28(6.5,-0.5) T29(7,-0.5) U1(-7,-1) U2(-6.5,-1) U3(-6,-1) U4(-5.5,-1) U5(-5,-1) U6(-4.5,-1) U7(-4,-1) U8(-3.5,-1) U9(-3,-1) U10(-2.5,-1) U11(-2,-1) U12(-1.5,-1) U13(-1,-1) U14(-0.5,-1) U15(0,-1) U16(0.5,-1) U17(1,-1) U18(1.5,-1) U19(2,-1) U20(2.5,-1) U21(3,-1) U22(3.5,-1) U23(4,-1) U24(4.5,-1) U25(5,-1) U26(5.5,-1) U27(6,-1) U28(6.5,-1) U29(7,-1) V1(-7,-1.5) V2(-6.5,-1.5) V11(-2,-1.5) V14(-0.5,-1.5) V16(0.5,-1.5) V19(2,-1.5) V28(6.5,-1.5) V29(7,-1.5) W1(-7,-2) W2(-6.5,-2) W3(-6,-2) W4(-5.5,-2) W5(-5,-2) W6(-4.5,-2) W7(-4,-2) W8(-3.5,-2) W9(-3,-2) W10(-2.5,-2) W11(-2,-2) W12(-1.5,-2) W13(-1,-2) W14(-0.5,-2) W16(0.5,-2) W17(1,-2) W18(1.5,-2) W19(2,-2) W20(2.5,-2) W21(3,-2) W22(3.5,-2) W23(4,-2) W24(4.5,-2) W25(5,-2) W26(5.5,-2) W27(6,-2) W28(6.5,-2) W29(7,-2) Y1(-7,-2.5) Y2(-6.5,-2.5) Y10(-2.5,-2.5) Y11(-2,-2.5) Y14(-0.5,-2.5) Y15(0,-2.5) Y16(0.5,-2.5) Y19(2,-2.5) Y20(2.5,-2.5) Y28(6.5,-2.5) Y29(7,-2.5)
  Top Layer region: -7.5,-8 -7.5,-7.5 -8,-7.5 -8,-8
  Top Layer region: 7.5,8 7.5,7.5 8,7.5 8,8
  Top Layer region: 8,-7.5 7.5,-7.5 7.5,-8 8,-8
  Top Layer region: -8,7.5 -7.5,7.5 -7.5,8 -8,8
  silkscreen extent -8.37,6.88 -8.13,7.12, body extent -7.5,-7.5 7.5,7.5, height 1.48
"BOARD-TO-BOARD DF40C-100DP-0.4V" [mm] "Stacking Board to Board Connector 100pol 0.4mm Pitch"
  rect 0.23x0.66 smd: 1(-9.8,1.355) 2(-9.8,-1.355) 3(-9.4,1.355) 4(-9.4,-1.355) 5(-9,1.355) 6(-9,-1.355) 7(-8.6,1.355) 8(-8.6,-1.355) 9(-8.2,1.355) 10(-8.2,-1.355) 11(-7.8,1.355) 12(-7.8,-1.355) 13(-7.4,1.355) 14(-7.4,-1.355) 15(-7,1.355) 16(-7,-1.355) 17(-6.6,1.355) 18(-6.6,-1.355) 19(-6.2,1.355) 20(-6.2,-1.355) 21(-5.8,1.355) 22(-5.8,-1.355) 23(-5.4,1.355) 24(-5.4,-1.355) 25(-5,1.355) 26(-5,-1.355) 27(-4.6,1.355) 28(-4.6,-1.355) 29(-4.2,1.355) 30(-4.2,-1.355) 31(-3.8,1.355) 32(-3.8,-1.355) 33(-3.4,1.355) 34(-3.4,-1.355) 35(-3,1.355) 36(-3,-1.355) 37(-2.6,1.355) 38(-2.6,-1.355) 39(-2.2,1.355) 40(-2.2,-1.355) 41(-1.8,1.355) 42(-1.8,-1.355) 43(-1.4,1.355) 44(-1.4,-1.355) 45(-1,1.355) 46(-1,-1.355) 47(-0.6,1.355) 48(-0.6,-1.355) 49(-0.2,1.355) 50(-0.2,-1.355) 51(0.2,1.355) 52(0.2,-1.355) 53(0.6,1.355) 54(0.6,-1.355) 55(1,1.355) 56(1,-1.355) 57(1.4,1.355) 58(1.4,-1.355) 59(1.8,1.355) 60(1.8,-1.355) 61(2.2,1.355) 62(2.2,-1.355) 63(2.6,1.355) 64(2.6,-1.355) 65(3,1.355) 66(3,-1.355) 67(3.4,1.355) 68(3.4,-1.355) 69(3.8,1.355) 70(3.8,-1.355) 71(4.2,1.355) 72(4.2,-1.355) 73(4.6,1.355) 74(4.6,-1.355) 75(5,1.355) 76(5,-1.355) 77(5.4,1.355) 78(5.4,-1.355) 79(5.8,1.355) 80(5.8,-1.355) 81(6.2,1.355) 82(6.2,-1.355) 83(6.6,1.355) 84(6.6,-1.355) 85(7,1.355) 86(7,-1.355) 87(7.4,1.355) 88(7.4,-1.355) 89(7.8,1.355) 90(7.8,-1.355) 91(8.2,1.355) 92(8.2,-1.355) 93(8.6,1.355) 94(8.6,-1.355) 95(9,1.355) 96(9,-1.355) 97(9.4,1.355) 98(9.4,-1.355) 99(9.8,1.355) 100(9.8,-1.355)
  rect 0.35x0.66 smd: MT(-10.275,-1.355) MT(-10.275,1.355) MT(10.275,-1.355) MT(10.275,1.355)
  Top Layer region: -10.875,1.355 -11.375,1.605 -11.375,1.105
  silkscreen extent -10.76,-0.92 10.76,0.92, body extent -10.76,-1.48 10.76,1.49, height 1.14
CAPC0603X03L [mm] "Chip Capacitor, 2-Leads, Body 0,60x0,30mm, IPC High Density"
  rect 0.27x0.3 smd paste-0.5: 1(-0.25,0) 2(0.25,0)
  body extent -0.3,-0.15 0.3,0.15, height 0.3
CAPC1005X06L [mm] "Chip Capacitor, 2-Leads, Body 1,00x0,50mm, IPC High Density"
  rect 0.38x0.48 smd: 1(-0.395,0) 2(0.395,0)
  body extent -0.5,-0.25 0.5,0.25, height 0.5
CAPC1608X10L [mm] "Chip Capacitor, 2-Leads, Body 1,60x0,80mm, IPC High Density"
  rect 0.63x0.8 smd: 1(-0.675,0) 2(0.675,0)
  body extent -0.8,-0.45 0.8,0.45, height 0.8
DFN38P60X29-2L [mm] "DFN, 2-Leads, Body 0,30x0,60mm, Pitch 0,38mm, IPC High Density"
  rect 0.2x0.3 smd paste-2539.97 mask+0.05: 1(-0.19,0) 2(0.19,0)
  silkscreen extent -0.25,0.4 -0.15,0.5, body extent -0.31,-0.16 0.3,0.15, height 0.29
DFN65P100X50-3L [mm] "DFN, 3-Leads, Body 0,60x1,00mm, Pitch 0,65mm, IPC High Density"
  rect 0.25x0.15 smd paste-2539.97 mask+0.05: 1(-0.325,0.175) 2(-0.325,-0.175)
  rect 0.25x0.5 smd paste-2539.97 mask+0.05: 3(0.325,0)
  silkscreen extent -0.57,0.68 -0.48,0.77, body extent -0.5,-0.3 0.5,0.3, height 0.38
DFN165P250X90-4N [mm] "DFN, 4-Leads, Body 2,00x2,50mm, Pitch 1,65mm, IPC Medium Density"
  oval 1.2x0.7 smd: 1(-0.75,0.825) 2(-0.75,-0.825) 3(0.75,-0.825) 4(0.75,0.825)
  silkscreen extent -1.3,1.35 -1.2,1.45, body extent -1,-1.25 1,1.25, height 0.9
DFN1006-2A [mm] "Leadless ultra small DFN1006-2A package (1mm × 0.6mm × 0.45mm)"
  rect 0.4x0.3 smd mask+0.05: 1(-0.4,0) 2(0.4,0)
  rect 0.3x0.55 smd mask+0.05: 1(-0.35,0) 2(0.35,0)
  body extent -0.5,-0.3 0.5,0.3, height 0.38
"FFC 33POL 0.3MM FH35C-33S-0.3SHW" [mm] "FFC 33pol 0.3mm FH35C-33S-0.3SHW"
  rect 0.3x0.8 smd: 1(4.8,-1.484) 3(4.2,-1.484) 5(3.6,-1.484) 7(3,-1.484) 9(2.4,-1.484) 11(1.8,-1.484) 13(1.2,-1.484) 15(0.6,-1.484) 17(0,-1.484) 19(-0.6,-1.484) 21(-1.2,-1.484) 23(-1.8,-1.484) 25(-2.4,-1.484) 27(-3,-1.484) 29(-3.6,-1.484) 31(-4.2,-1.484) 33(-4.8,-1.484)
  rect 0.3x0.65 smd: 2(4.5,1.391) 4(3.9,1.391) 6(3.3,1.391) 8(2.7,1.391) 10(2.1,1.391) 12(1.5,1.391) 14(0.9,1.391) 16(0.3,1.391) 18(-0.3,1.391) 20(-0.9,1.391) 22(-1.5,1.391) 24(-2.1,1.391) 26(-2.7,1.391) 28(-3.3,1.391) 30(-3.9,1.391) 32(-4.5,1.391)
  rect 0.4x0.95 smd: MT(-5.5,-1.209) MT(5.5,-1.209)
  silkscreen extent -5.75,-1.97 6.5,2.47, body extent -5.75,-1.73 5.75,2.47, height 0.9
INDC0603X03L [mm] "Chip Inductor, 2-Leads, Body 0,60x0,30mm, IPC High Density"
  rect 0.37x0.32 smd: 1(-0.27,0) 2(0.27,0)
  body extent -0.32,-0.17 0.32,0.17, height 0.33
INDC2012X10L [mm] "Chip Inductor, 2-Leads, Body 2,00x1,25mm, IPC High Density"
  rect 0.92x1.33 smd: 1(-0.79,0) 2(0.79,0)
  body extent -1.08,-0.7 1.07,0.7, height 1
INDC2016X12L [mm] "Chip Inductor, 2-Leads, Body 2,00x1,60mm, IPC High Density"
  rect 0.99x1.72 smd: 1(-0.755,0) 2(0.755,0)
  body extent -1.1,-0.9 1.1,0.9, height 1.2
LGA120C50P19X22_1000X1500X150 [mm] "LGA, 120-Leads, Body 10,00x15,00mmx1,50mm, Pitch 0,50mm"
  rect 0.6x0.3 smd: 1(6.9,-4.5) 2(6.9,-4) 3(6.9,-3.5) 4(6.9,-3) 5(6.9,-2.5) 6(6.9,-2) 7(6.9,-1.5) 8(6.9,-1) 9(6.9,-0.5) 10(6.9,0) 11(6.9,0.5) 12(6.9,1) 13(6.9,1.5) 14(6.9,2) 15(6.9,2.5) 16(6.9,3) 17(6.9,3.5) 18(6.9,4) 19(6.9,4.5) 45(-6.9,4.5) 46(-6.9,4) 47(-6.9,3.5) 48(-6.9,3) 49(-6.9,2.5) 50(-6.9,2) 51(-6.9,1.5) 52(-6.9,1) 53(-6.9,0.5) 54(-6.9,0) 55(-6.9,-0.5) 56(-6.9,-1) 57(-6.9,-1.5) 58(-6.9,-2) 59(-6.9,-2.5) 60(-6.9,-3) 61(-6.9,-3.5) 62(-6.9,-4) 63(-6.9,-4.5)
  rect 0.3x0.6 smd: 20(6,4.4) 21(5.5,4.4) 22(5,4.4) 23(4.5,4.4) 24(4,4.4) 25(3.5,4.4) 26(3,4.4) 27(2.5,4.4) 28(2,4.4) 29(1.5,4.4) 30(1,4.4) 31(0.5,4.4) 32(0,4.4) 33(-0.5,4.4) 34(-1,4.4) 35(-1.5,4.4) 36(-2,4.4) 37(-2.5,4.4) 38(-3,4.4) 39(-3.5,4.4) 40(-4,4.4) 41(-4.5,4.4) 42(-5,4.4) 43(-5.5,4.4) 44(-6,4.4) 64(-6,-4.4) 65(-5.5,-4.4) 66(-5,-4.4) 67(-4.5,-4.4) 68(-4,-4.4) 69(-3.5,-4.4) 70(-3,-4.4) 71(-2.5,-4.4) 72(-2,-4.4) 73(-1.5,-4.4) 74(-1,-4.4) 75(-0.5,-4.4) 76(0,-4.4) 77(0.5,-4.4) 78(1,-4.4) 79(1.5,-4.4) 80(2,-4.4) 81(2.5,-4.4) 82(3,-4.4) 83(3.5,-4.4) 84(4,-4.4) 85(4.5,-4.4) 86(5,-4.4) 87(5.5,-4.4) 88(6,-4.4)
  rect 0.8x0.8 smd: 89(5.6,-2.4) 90(5.6,-0.8) 91(5.6,0.8) 92(5.6,2.4) 93(4,-2.4) 94(4,-0.8) 95(4,0.8) 96(4,2.4) 97(2.4,-2.4) 98(2.4,-0.8) 99(2.4,0.8) 100(2.4,2.4) 101(0.836,-2.4) 102(0.8,-0.8) 103(0.8,0.8) 104(0.8,2.4) 105(-0.8,-2.4) 106(-0.8,-0.8) 107(-0.8,0.8) 108(-0.8,2.4) 109(-2.4,-2.4) 110(-2.4,-0.8) 111(-2.4,0.8) 112(-2.4,2.4) 113(-4,-2.4) 114(-4,-0.8) 115(-4,0.8) 116(-4,2.4) 117(-5.6,-2.4) 118(-5.6,-0.8) 119(-5.6,0.8) 120(-5.6,2.4)
  Top Layer region: 8,-5 7.5,-5 7.5,-5.5 8,-5.5
  Top Layer region: -7.5,-5.5 -7.5,-5 -8,-5 -8,-5.5
  Top Layer region: -8,5 -7.5,5 -7.5,5.5 -8,5.5
  Top Layer region: 7.5,5.5 7.5,5 8,5 8,5.5
  silkscreen extent 8.2,-4.55 8.3,-4.45, body extent -7.5,-5 7.5,5, height 1.6
Net_Tie_0.2mm#1 [mm]
  rect 0.2x0.2 on Mid4 mask+0.102: 1(0.1,0.1) 2(0.4,0.1)
  Layer 4 region: 0,0 0.5,0 0.5,0.2 0,0.2
Net_Tie_0.2mm#2 [mm]
  rect 0.2x0.2 on Mid5 mask+0.102: 1(0.1,0.1) 2(0.4,0.1)
  Layer 5 region: 0,0 0.5,0 0.5,0.2 0,0.2
OSCILLATOR_SITIME_SiT1532AI-J4-D14-32.768E [mm] "10 ppm Ultra-Low Power 32.768 kHz XTAL Replacement"
  round 0.25 smd: 1(-0.205,0.5) 2(-0.205,-0.5) 3(0.195,-0.5) 4(0.205,0.5)
  silkscreen extent -0.55,0.85 -0.45,0.95, body extent -0.42,-0.77 0.42,0.77, height 0.54
PSON40P70X32-6N [mm] "PSON, 6-Leads, Body 1,10x0,70mm, Pitch 0,40mm, IPC Medium Density"
  rect 0.25x0.25 smd paste-0.25: 1(0.2,-0.4) 2(0.2,0) 3(0.2,0.4) 4(-0.2,0.4) 5(-0.2,0) 6(-0.2,-0.4)
  silkscreen extent 0.52,-0.81 0.62,-0.71, body extent -0.38,-0.58 0.38,0.58, height 0.32
PSON50P100X50-8L [mm] "PSON, 8-Leads, Body 1,95x1,00mm, Pitch 0,50mm, IPC High Density"
  rect 0.3x0.2 smd: 1(-0.29,0.75) 2(-0.29,0.25) 3(-0.29,-0.25) 4(-0.29,-0.75) 5(0.29,-0.75) 6(0.29,-0.25) 7(0.29,0.25) 8(0.29,0.75)
  body extent -0.53,-1 0.53,1, height 0.5
QFN40P170X200X50-12L [mm] "QFN, 12-Leads, Body 1,70x2,00mm, Pitch 0,40mm, IPC High Density"
  rrect50% 0.7x0.32 smd mask+0.05: 1(-0.7,0.85)
  rrect50% 0.7x0.2 smd mask+0.05: 2(-0.7,0.4) 3(-0.7,0) 4(-0.7,-0.4) 5(-0.7,-0.8) 7(0.7,-0.8) 8(0.7,-0.4) 9(0.7,0) 10(0.7,0.4) 11(0.7,0.8)
  rrect50% 0.2x0.7 smd mask+0.05: 6(0,-0.85) 12(0,0.85)
  silkscreen extent -1.25,1.3 -1.15,1.4, body extent -0.85,-1 0.85,1, height 0.5
QFN40P300X300X33_HS-21L [mm] "QFN, 20-Leads, Body 3,00x3,00mm, Pitch 0,40mm, Thermal Pad 1,90x1,90mm, IPC High Density"
  oval 0.6x0.2 smd: 1(-1.45,0.8) 2(-1.45,0.4) 3(-1.45,0) 4(-1.45,-0.4) 5(-1.45,-0.8) 11(1.45,-0.8) 12(1.45,-0.4) 13(1.45,0) 14(1.45,0.4) 15(1.45,0.8)
  oval 0.2x0.6 smd: 6(-0.8,-1.45) 7(-0.4,-1.45) 8(0,-1.45) 9(0.4,-1.45) 10(0.8,-1.45) 16(0.8,1.45) 17(0.4,1.45) 18(0,1.45) 19(-0.4,1.45) 20(-0.8,1.45)
  rect 1.9x1.9 smd paste-0.95: 21(0,0)
  body extent -1.55,-1.55 1.55,1.55, height 0.33
QFN40P700X700X100_HS-57L [mm] "QFN, 56-Leads, Body 7,00x7,00mm, Pitch 0,40mm, Thermal Pad 4,70x4,70mm, IPC High Density"
  oval 0.85x0.25 smd: 1(-3.3,2.6) 2(-3.3,2.2) 3(-3.3,1.8) 4(-3.3,1.4) 5(-3.3,1) 6(-3.3,0.6) 7(-3.3,0.2) 8(-3.3,-0.2) 9(-3.3,-0.6) 10(-3.3,-1) 11(-3.3,-1.4) 12(-3.3,-1.8) 13(-3.3,-2.2) 14(-3.3,-2.6) 29(3.3,-2.6) 30(3.3,-2.2) 31(3.3,-1.8) 32(3.3,-1.4) 33(3.3,-1) 34(3.3,-0.6) 35(3.3,-0.2) 36(3.3,0.2) 37(3.3,0.6) 38(3.3,1) 39(3.3,1.4) 40(3.3,1.8) 41(3.3,2.2) 42(3.3,2.6)
  oval 0.25x0.85 smd: 15(-2.6,-3.3) 16(-2.2,-3.3) 17(-1.8,-3.3) 18(-1.4,-3.3) 19(-1,-3.3) 20(-0.6,-3.3) 21(-0.2,-3.3) 22(0.2,-3.3) 23(0.6,-3.3) 24(1,-3.3) 25(1.4,-3.3) 26(1.8,-3.3) 27(2.2,-3.3) 28(2.6,-3.3) 43(2.6,3.3) 44(2.2,3.3) 45(1.8,3.3) 46(1.4,3.3) 47(1,3.3) 48(0.6,3.3) 49(0.2,3.3) 50(-0.2,3.3) 51(-0.6,3.3) 52(-1,3.3) 53(-1.4,3.3) 54(-1.8,3.3) 55(-2.2,3.3) 56(-2.6,3.3)
  rect 4.7x4.7 smd paste-5: 57(0,0)
  silkscreen extent -4.42,-3.65 3.65,3.65, body extent -3.5,-3.5 3.5,3.5, height 1
QFN50P250X300X80_HS-13L [mm] "QFN, 12-Leads, Body 2,50x3,00mm, Pitch 0,50mm, Thermal Pad 1,00x1,50mm, IPC High Density"
  oval 0.25x0.6 smd: 1(-0.25,1.4) 7(-0.25,-1.4) 8(0.25,-1.4) 14(0.25,1.4)
  oval 0.6x0.25 smd: 2(-1.15,1) 3(-1.15,0.5) 4(-1.15,0) 5(-1.15,-0.5) 6(-1.15,-1) 9(1.15,-1) 10(1.15,-0.5) 11(1.15,0) 12(1.15,0.5) 13(1.15,1)
  rect 1x1.5 smd paste-2539.97: 15(0,0)
  body extent -1.25,-1.5 1.25,1.5, height 0.8
QFN50P300X200X60_HS-9L [mm] "QFN, 8-Leads, Body 3,00x2,00mm, Pitch 0,50mm, Thermal Pad 0,20x1,60mm, IPC High Density"
  oval 0.75x0.25 smd: 1(-1.325,0.75) 2(-1.325,0.25) 3(-1.325,-0.25) 4(-1.325,-0.75) 5(1.325,-0.75) 6(1.325,-0.25) 7(1.325,0.25) 8(1.325,0.75)
  rect 0.25x1.6 smd: 9(0,0)
  silkscreen extent -1.53,1.43 -1.28,1.67, body extent -1.5,-1 1.5,1, height 0.58
QFN50P350X900X80_HS-43L [mm] "QFN, 42-Leads, Body 3,50x9,00mm, Pitch 0,50mm, Thermal Pad 2,05x7,55mm, IPC High Density"
  oval 0.7x0.25 smd: 1(-1.625,4) 2(-1.625,3.5) 3(-1.625,3) 4(-1.625,2.5) 5(-1.625,2) 6(-1.625,1.5) 7(-1.625,1) 8(-1.625,0.5) 9(-1.625,0) 10(-1.625,-0.5) 11(-1.625,-1) 12(-1.625,-1.5) 13(-1.625,-2) 14(-1.625,-2.5) 15(-1.625,-3) 16(-1.625,-3.5) 17(-1.625,-4) 22(1.625,-4) 23(1.625,-3.5) 24(1.625,-3) 25(1.625,-2.5) 26(1.625,-2) 27(1.625,-1.5) 28(1.625,-1) 29(1.625,-0.5) 30(1.625,0) 31(1.625,0.5) 32(1.625,1) 33(1.625,1.5) 34(1.625,2) 35(1.625,2.5) 36(1.625,3) 37(1.625,3.5) 38(1.625,4)
  oval 0.25x0.7 smd: 18(-0.75,-4.375) 19(-0.25,-4.375) 20(0.25,-4.375) 21(0.75,-4.375) 39(0.75,4.375) 40(0.25,4.375) 41(-0.25,4.375) 42(-0.75,4.375)
  rect 2.05x7.55 smd paste-1.025: 43(0,0)
  silkscreen extent -2.72,-4.7 1.95,4.7, body extent -1.75,-4.5 1.75,4.5, height 0.8
QFN50P700X700X100_HS-49L [mm] "QFN, 48-Leads, Body 7,00x7,00mm, Pitch 0,50mm, Thermal Pad 5,05x5,05mm, IPC High Density"
  oval 0.75x0.25 smd: 1(-3.35,2.75) 2(-3.35,2.25) 3(-3.35,1.75) 4(-3.35,1.25) 5(-3.35,0.75) 6(-3.35,0.25) 7(-3.35,-0.25) 8(-3.35,-0.75) 9(-3.35,-1.25) 10(-3.35,-1.75) 11(-3.35,-2.25) 12(-3.35,-2.75) 25(3.35,-2.75) 26(3.35,-2.25) 27(3.35,-1.75) 28(3.35,-1.25) 29(3.35,-0.75) 30(3.35,-0.25) 31(3.35,0.25) 32(3.35,0.75) 33(3.35,1.25) 34(3.35,1.75) 35(3.35,2.25) 36(3.35,2.75)
  oval 0.25x0.75 smd: 13(-2.75,-3.35) 14(-2.25,-3.35) 15(-1.75,-3.35) 16(-1.25,-3.35) 17(-0.75,-3.35) 18(-0.25,-3.35) 19(0.25,-3.35) 20(0.75,-3.35) 21(1.25,-3.35) 22(1.75,-3.35) 23(2.25,-3.35) 24(2.75,-3.35) 37(2.75,3.35) 38(2.25,3.35) 39(1.75,3.35) 40(1.25,3.35) 41(0.75,3.35) 42(0.25,3.35) 43(-0.25,3.35) 44(-0.75,3.35) 45(-1.25,3.35) 46(-1.75,3.35) 47(-2.25,3.35) 48(-2.75,3.35)
  rect 5.05x5.05 smd paste-3: 49(0,0)
  body extent -3.51,-3.51 3.51,3.51, height 1
RESC0603X03L [mm] "Chip Resistor, 2-Leads, Body 0,60x0,30mm, IPC High Density"
  rect 0.27x0.3 smd paste-0.5: 1(-0.25,0) 2(0.25,0)
  body extent -0.3,-0.15 0.3,0.15, height 0.26
RESC1005X04L [mm] "Chip Resistor, 2-Leads, Body 1,00x0,53mm, IPC High Density"
  rect 0.38x0.48 smd: 1(-0.395,0) 2(0.395,0)
  body extent -0.52,-0.27 0.53,0.28, height 0.4
SON65P200X80_HS-7L [mm] "SON, 6-Leads, Body 2,00x2,00mm, Pitch 0,65mm, Thermal Pad 1,60x0,89mm, IPC High Density"
  rect 0.45x0.3 smd: 1(-0.975,0.65) 2(-0.975,0) 3(-0.975,-0.65) 4(0.975,-0.65) 5(0.975,0) 6(0.975,0.65)
  rect 1x1.65 smd: 7(0,0)
  silkscreen extent -1.05,1.35 -0.95,1.45, body extent -1.05,-1.05 1.05,1.05, height 0.8
SW_DIP_4POL_97C04SRT [mm] "4Pol Dip Switch 1.27mm Pitch 1.6mm Height"
  rect 0.75x1.25 smd: 1(-1.905,-3.075) 2(-0.635,-3.075) 3(0.635,-3.075) 4(1.905,-3.075) 5(1.905,3.075) 6(0.635,3.075) 7(-0.635,3.075) 8(-1.905,3.075)
  silkscreen extent -3.25,-3.25 3.15,2.25, body extent -3.15,-3.35 3.15,3.35, height 1.5
SW_TACT_EVQ-P7J01P [mm] "Tactile Switch EVQ-P7J01P SMD"
  rect 1.4x1 smd: 1(-1.8,0.7) 1(1.8,0.7) 2(-1.8,-0.7) 2(1.8,-0.7)
  silkscreen extent -0.75,1.6 0.75,1.6, body extent -2.35,-2.1 2.35,1.59, height 1.35
TP_0.50MM [mm] "Testpoint 0.50mm diameter"
  round 0.5 smd paste-1: TP(0,0)
  body extent -0.2,-0.2 0.2,0.2, height 0.1
TP_0.50mm [mm] "Testpoint 0.50mm diameter"
  round 0.5 smd paste-1: TP(0,0)
  body extent -0.2,-0.2 0.2,0.2, height 0.1
TP_0.75mm [mm] "Testpoint 0.75mm diameter"
  round 0.75 smd paste-1: TP(0,0)
  body extent -0.3,-0.3 0.3,0.3, height 0.1
"U.FL Jack SMD" [mm] "Linx Technologies CONMHF1-SMD"
  rect 1x1.05 smd: 1(0,1.525) 2(0,-1.525)
  rect 1.05x2.2 smd: 2(-1.475,0) 2(1.475,0)
  Top Layer pour cut-out: -0.95,-1 0.95,-1 0.95,1 -0.95,1
  body extent -1.5,-1.55 1.5,1.55, height 1.25
VSON50P150X150X100_HS-6L [mm] "DMQ (VSON-HR, 6) Package 1.5mm X 1.5mm x 1mm"
  rrect25% 0.7x0.35 smd paste-2539.97 mask-2539.97: 1(-0.65,0.5) 2(-0.65,0) 3(-0.65,-0.5)
  rrect25% 1.1x0.3 smd paste-2539.97 mask-2539.97: 4(0.45,-0.5) 5(0.45,0) 6(0.45,0.5)
  body extent -0.75,-0.75 0.75,0.75, height 1
"WIFI-BLE Module_LBEE5PK2BC" [mm] "WIFI and BLE Module SMD"
  rect 0.3x0.45 smd: 1(-3.3,-3.375) 2(-2.7,-3.375) 3(-2.1,-3.375) 4(-1.5,-3.375) 5(-0.9,-3.375) 6(-0.3,-3.375) 7(0.3,-3.375) 8(0.9,-3.375) 9(1.5,-3.375) 10(2.1,-3.375) 11(2.7,-3.375) 12(3.3,-3.375) 23(3.3,3.375) 24(2.7,3.375) 25(2.1,3.375) 26(1.5,3.375) 27(0.9,3.375) 28(0.3,3.375) 29(-0.3,3.375) 30(-0.9,3.375) 31(-1.5,3.375) 32(-2.1,3.375) 33(-2.7,3.375) 34(-3.3,3.375) 45(-1.5,-2.175) 46(-0.9,-2.175) 47(-0.3,-2.175) 48(0.3,-2.175) 49(0.9,-2.175) 50(1.5,-2.175) 57(1.5,2.175) 58(0.9,2.175) 59(0.3,2.175) 60(-0.3,2.175) 61(-0.9,2.175) 62(-1.5,2.175) 69(-1,-1) 70(0,-1) 71(1,-1) 72(1,0) 73(1,1) 74(0,1) 75(-1,1) 76(-1,0) 77(0,0)
  rect 0.45x0.3 smd: 13(3.475,-2.7) 14(3.475,-2.1) 15(3.475,-1.5) 16(3.475,-0.9) 17(3.475,-0.3) 18(3.475,0.3) 19(3.475,0.9) 20(3.475,1.5) 21(3.475,2.1) 22(3.475,2.7) 35(-3.475,2.7) 36(-3.475,2.1) 37(-3.475,1.5) 38(-3.475,0.9) 39(-3.475,0.3) 40(-3.475,-0.3) 41(-3.475,-0.9) 42(-3.475,-1.5) 43(-3.475,-2.1) 44(-3.475,-2.7) 51(2.275,-1.5) 52(2.275,-0.9) 53(2.275,-0.3) 54(2.275,0.3) 55(2.275,0.9) 56(2.275,1.5) 63(-2.275,1.5) 64(-2.275,0.9) 65(-2.275,0.3) 66(-2.275,-0.3) 67(-2.275,-0.9) 68(-2.275,-1.5)
  Top Layer region: -4,-4.4 -4,-3.9 -4.5,-3.9 -4.5,-4.4
  Top Layer region: 4.5,-3.9 4,-3.9 4,-4.4 4.5,-4.4
  Top Layer region: 4,4.4 4,3.9 4.5,3.9 4.5,4.4
  Top Layer region: -4.5,3.9 -4,3.9 -4,4.4 -4.5,4.4
  silkscreen extent -4.55,-3.55 -4.45,-3.45, body extent -4,-3.9 4,3.9, height 1.19
X2SON-DFN [mil] "X2SON small outline to lead"
  round 1 smd paste-99999 mask+4: 1(-21.63,12.8) 2(-21.63,-12.8) 3(21.63,-12.8) 4(21.63,12.8)
  rect 22.83x22.83 smd rot 45 paste-99999 mask+4: 5(0,0)
  Top Layer region: -27.14,18.9 -27.14,6.69 -16.32,6.69 -9.03,13.98 -9.03,18.9
  Top Layer region: 27.14,18.9 27.14,6.69 16.32,6.69 9.03,13.98 9.03,18.9
  Top Layer region: 27.14,-18.9 27.14,-6.69 16.32,-6.69 9.03,-13.98 9.03,-18.9
  Top Layer region: -27.14,-18.9 -27.14,-6.69 -16.32,-6.69 -9.03,-13.98 -9.03,-18.9
  body extent -20,-20 20,20, height 18
XQFN8_160X106X50 [mm] "XQFN Not leads 8-pin 1.6mm x 1.6mm x 0.5mm"
  rect 0.4x0.32 smd: 1(-0.6,0.5)
  rect 0.4x0.22 smd: 2(-0.6,0) 3(-0.6,-0.5) 5(0.6,-0.5) 6(0.6,0) 7(0.6,0.5)
  rect 0.22x0.4 smd: 4(0,-0.6) 8(0,0.6)
  body extent -0.8,-0.8 0.8,0.8, height 0.5

## Part data
ANT1: library part "Chip Antenna_ACAR0301-SW2", "Ceramic Chip Antenna ACAR0301-SW2 2.4 - 5.825GHZ", Manufacturer 1=ABRACON, Manufacturer 1 Prt. Nr.=ACAR0301-SW2
C1 C2 C3 C4 C8 C9 C10 C11 C15 C16 C17 C18: library part CAP_0603_22µ_10V, "Multilayer Ceramic Capacitors MLCC - SMD/SMT 0603 10VDC", Manufacturer 1="Murata Electronics", Manufacturer 1 Prt. Nr.=GRM188R61A226ME15D, Manufacturer 2="Samsung Electro-Mechanics", Manufacturer 2 Prt. Nr.=CL10A226MP8NRNC
C5 C6 C7 C12 C13 C14 C19 C20 C21 C25 C26 C28: library part CAP_0603_10µ_25V, "Multilayer Ceramic Capacitors MLCC - SMD/SMT 0603 25VDC", Manufacturer 1="Murata Electronics", Manufacturer 1 Prt. Nr.=GRM188R61E106KA73J, Manufacturer 2="Samsung Electro-Mechanics", Manufacturer 2 Prt. Nr.=CL10A106MA8NRNC
C22 C23 C29 C31 C32 C33 C115 C116 C121 C122 C129 C130 C178 C179 C181 C183 C184 C185 C187 C188 C190 C191: library part CAP_0402_10µ_10V, "Multilayer Ceramic Capacitors MLCC - SMD/SMT 0402 10VDC", Manufacturer 1="Murata Electronics", Manufacturer 1 Prt. Nr.=GRM155R61A106ME11D, Manufacturer 2="KYOCERA AVX", Manufacturer 2 Prt. Nr.=0402ZD106MAT4A